# EAGLE board LED Plate PCB (EAGLE 9.7.0)
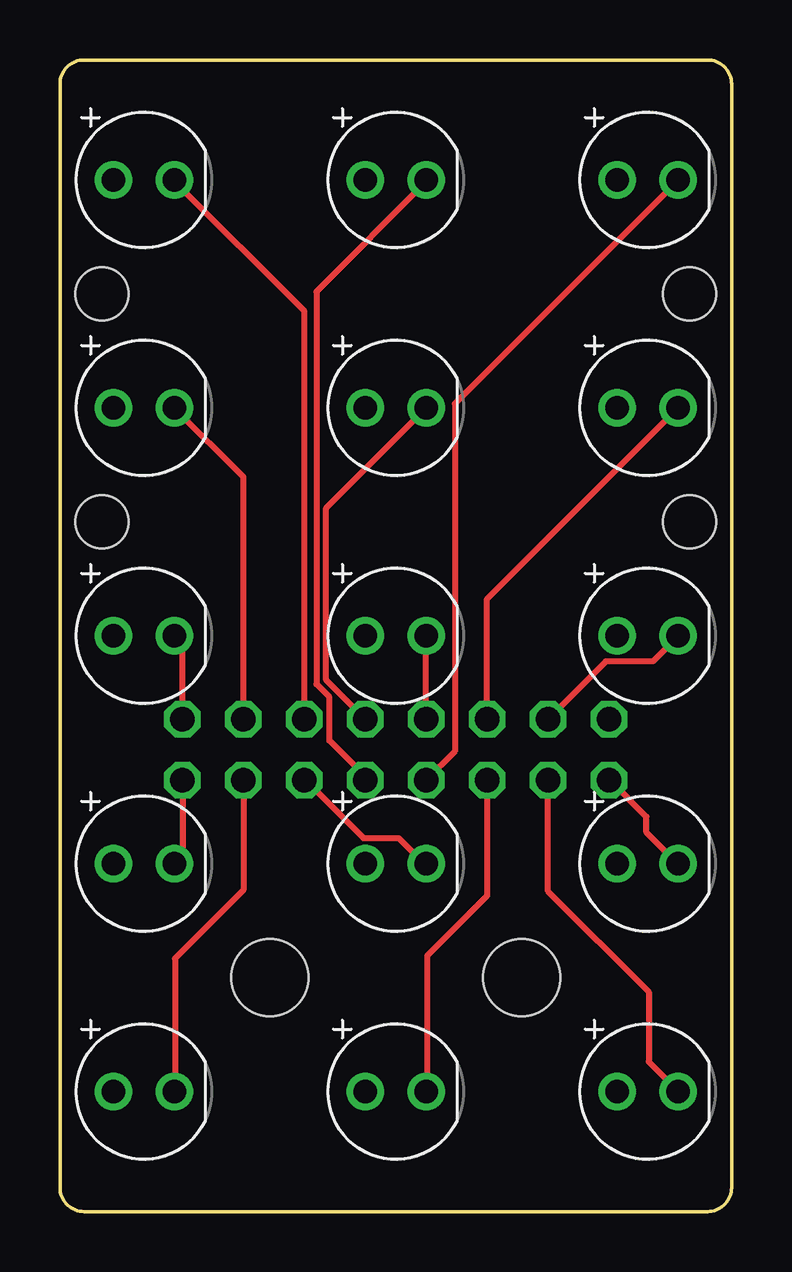
[diagram p0: board, top side]
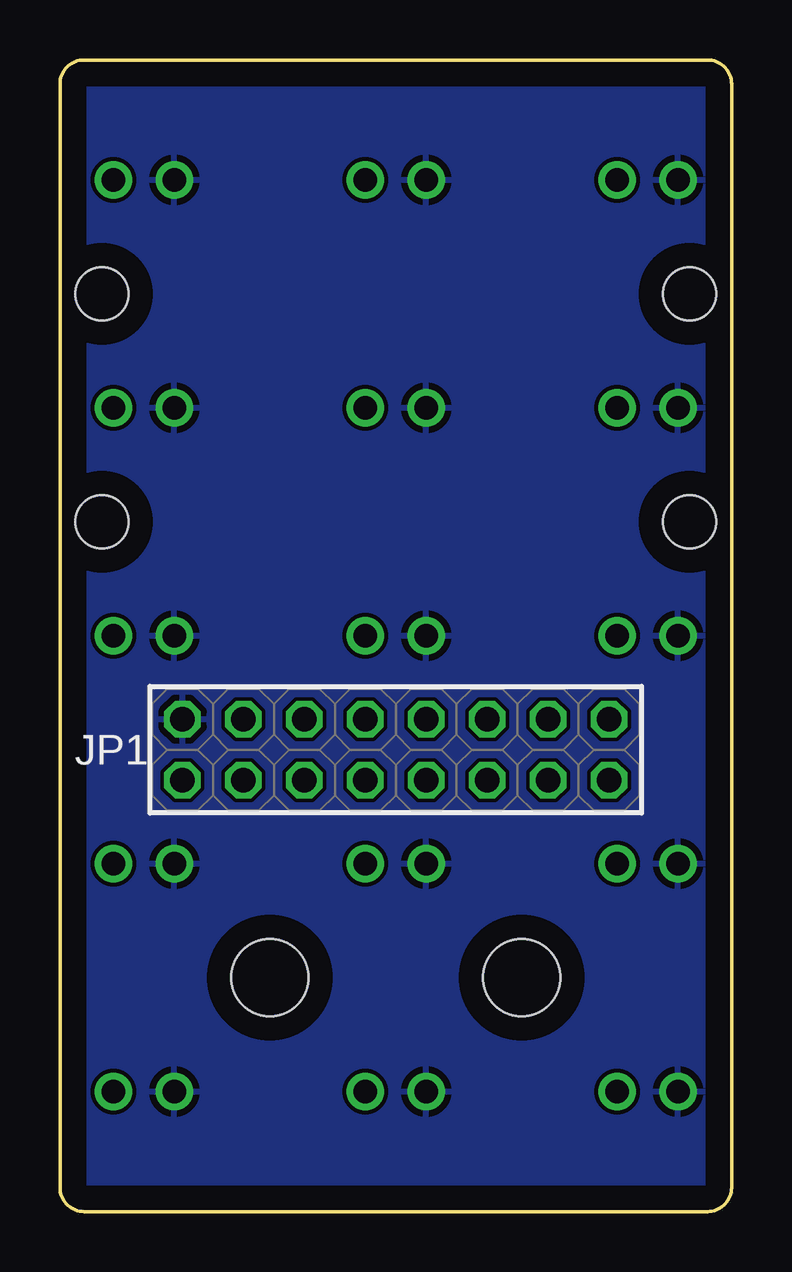
[diagram p1: board, bottom side, seen from below]

Size 28 x 48 mm. Coordinates in mm from the lower left corner, seen from the top.
Outline: 0,47 0,1 arc90 1,0 27,0 arc90 28,1 28,47 arc90 27,48 1,48 arc90 0,47
Copper layers (1*16): Top 0.035mm / dielectric 1.5mm / Bottom 0.035mm
Design rules "Fusion Electronics Design Rules": minimum track width 10mil, minimum drill 0.35mm, track to track 6mil, track to pad 6mil, pad to pad 6mil, via to via 6mil, smd to smd 6mil, copper to edge 40mil, drill to drill 6mil, minimum pad ring 10mil, minimum via ring 8mil, stop-mask expansion 4mil, vias tented up to drill 9999mil, thermal gap 10mil
Net classes: 1 Power: width 0.254 mm
Holes 2.2 mm at 26.25,38.25 1.75,38.25 26.25,28.75 1.75,28.75
Holes 3.2 mm at 8.75,9.75 19.25,9.75

## Footprints (pad centres in the part's own frame; a part is rotated, then mirrored left to right if it is on the bottom)
2X08 = drill 1.016 octagon: 1 -8.89,1.27; 2 -6.35,1.27; 3 -3.81,1.27; 4 -1.27,1.27; 5 1.27,1.27; 6 3.81,1.27; 7 6.35,1.27; 8 8.89,1.27; 9 -8.89,-1.27; 10 -6.35,-1.27; 11 -3.81,-1.27; 12 -1.27,-1.27; 13 1.27,-1.27; 14 3.81,-1.27; 15 6.35,-1.27; 16 8.89,-1.27
LEDRD254W60D565H860B_R = drill 0.981 pad 1.581: A -1.27,0; C 1.27,0

## Placement (x,y rotation side)
JP1  PINHD-2X8  [2X08]  14,19.25 0 bottom
LED1  LED_RADIALRED  [LEDRD254W60D565H860B_R]  24.5,14.5 0 top
LED2  LED_RADIALRED  [LEDRD254W60D565H860B_R]  24.5,5 0 top
LED3  LED_RADIALRED  [LEDRD254W60D565H860B_R]  14,5 0 top
LED4  LED_RADIALRED  [LEDRD254W60D565H860B_R]  24.5,43 0 top
LED5  LED_RADIALRED  [LEDRD254W60D565H860B_R]  14,43 0 top
LED6  LED_RADIALRED  [LEDRD254W60D565H860B_R]  14,14.5 0 top
LED7  LED_RADIALRED  [LEDRD254W60D565H860B_R]  3.5,5 0 top
LED8  LED_RADIALRED  [LEDRD254W60D565H860B_R]  3.5,14.5 0 top
LED9  LED_RADIALRED  [LEDRD254W60D565H860B_R]  3.5,24 0 top
LED10  LED_RADIALRED  [LEDRD254W60D565H860B_R]  3.5,33.5 0 top
LED11  LED_RADIALRED  [LEDRD254W60D565H860B_R]  3.5,43 0 top
LED12  LED_RADIALRED  [LEDRD254W60D565H860B_R]  14,33.5 0 top
LED13  LED_RADIALRED  [LEDRD254W60D565H860B_R]  14,24 0 top
LED14  LED_RADIALRED  [LEDRD254W60D565H860B_R]  24.5,33.5 0 top
LED15  LED_RADIALRED  [LEDRD254W60D565H860B_R]  24.5,24 0 top

## Library data of the parts
JP1 = Connector; CATEGORY: Connectors; DESCRIPTION: Header-Straight-2x8 Position; PACKAGE_TYPE: Through Hole; PITCH: 0.100" (2.54mm); SUBCATEGORY: Headers; TYPE: Male Pins
LED1-LED15 = Opto-Electronic; CATEGORY: Optoelectronics; COLOR: Red; DESCRIPTION: Radial LED (Round) 2.54 mm pitch 5.65 mm body diameter 8.60 mm body height Red; PACKAGE_SIZE: 5mm; PACKAGE_TYPE: Through Hole; SUBCATEGORY: LED; TYPE: Round

## Nets
3V3 [Power]: JP1.1 LED1.A LED2.A LED3.A LED4.A LED5.A LED6.A LED7.A LED8.A LED9.A LED10.A LED11.A LED12.A LED13.A LED14.A LED15.A
LED1: JP1.9 LED1.C
LED2: JP1.10 LED2.C
LED3: JP1.11 LED3.C
LED4: JP1.12 LED4.C
LED5: JP1.13 LED5.C
LED6: JP1.14 LED6.C
LED7: JP1.15 LED7.C
LED8: JP1.16 LED8.C
LED9: JP1.8 LED9.C
LED10: JP1.7 LED10.C
LED11: JP1.6 LED11.C
LED12: JP1.5 LED12.C
LED13: JP1.4 LED13.C
LED14: JP1.3 LED14.C
LED15: JP1.2 LED15.C

## Tracks (layer width: path | path; a pad name or v marks a point on that pad's centre or on a via)
3V3
  pour Bottom: 0.28,-3.37 28.57,-3.37 37.02,5.08 37.02,46.52 28.87,54.67 -3.72,54.67 -5.02,53.37 -5.02,1.93
LED1
  Top 0.254: LED1.C 25.75,14.5 24.45,15.8 24.45,16.45 22.92,17.98 JP1.9
LED2
  Top 0.254: JP1.10 20.35,13.35 24.55,9.15 24.55,6.24 25.77,5.02 LED2.C
LED3
  Top 0.254: JP1.11 17.81,13.16 15.31,10.66 15.31,5.04 LED3.C
LED4
  Top 0.254: LED4.C 25.77,42.98 16.47,33.68 16.47,19.18 JP1.12
LED5
  Top 0.254: JP1.13 12.73,18.13 11.23,19.63 11.23,21.44 10.69,21.98 10.69,38.34 15.27,42.92 LED5.C
LED6
  Top 0.254: JP1.14 10.24,17.98 12.65,15.57 14.12,15.57 15.19,14.5 LED6.C
LED7
  Top 0.254: JP1.15 7.65,13.4 4.8,10.55 4.8,5.03 LED7.C
LED8
  Top 0.254: JP1.16 5.11,14.84 LED8.C
LED9
  Top 0.254: JP1.8 5.11,23.66 LED9.C
LED10
  Top 0.254: JP1.7 7.65,30.62 LED10.C
LED11
  Top 0.254: JP1.6 10.19,37.53 4.77,42.95 LED11.C
LED12
  Top 0.254: JP1.5 11.1,22.15 11.1,29.33 LED12.C
LED13
  Top 0.254: JP1.4 LED13.C
LED14
  Top 0.254: JP1.3 17.81,25.54 LED14.C
LED15
  Top 0.254: JP1.2 22.76,22.93 24.72,22.93 25.77,23.98 LED15.C